# Altium PCB NEAR_DAUGHTER.PcbDoc
Units mm, origin at the board's own origin, x right, y up, seen from the top; angles counter-clockwise.
Board outline 16 x 30 mm, 4 copper layers (SIG TOP, GND, PWR, SIG BOT), stack 0.603 mm thick; 17 components, 22 nets, 141 pads, 49 vias.
Unrouted connection lines stored in the file: 23.
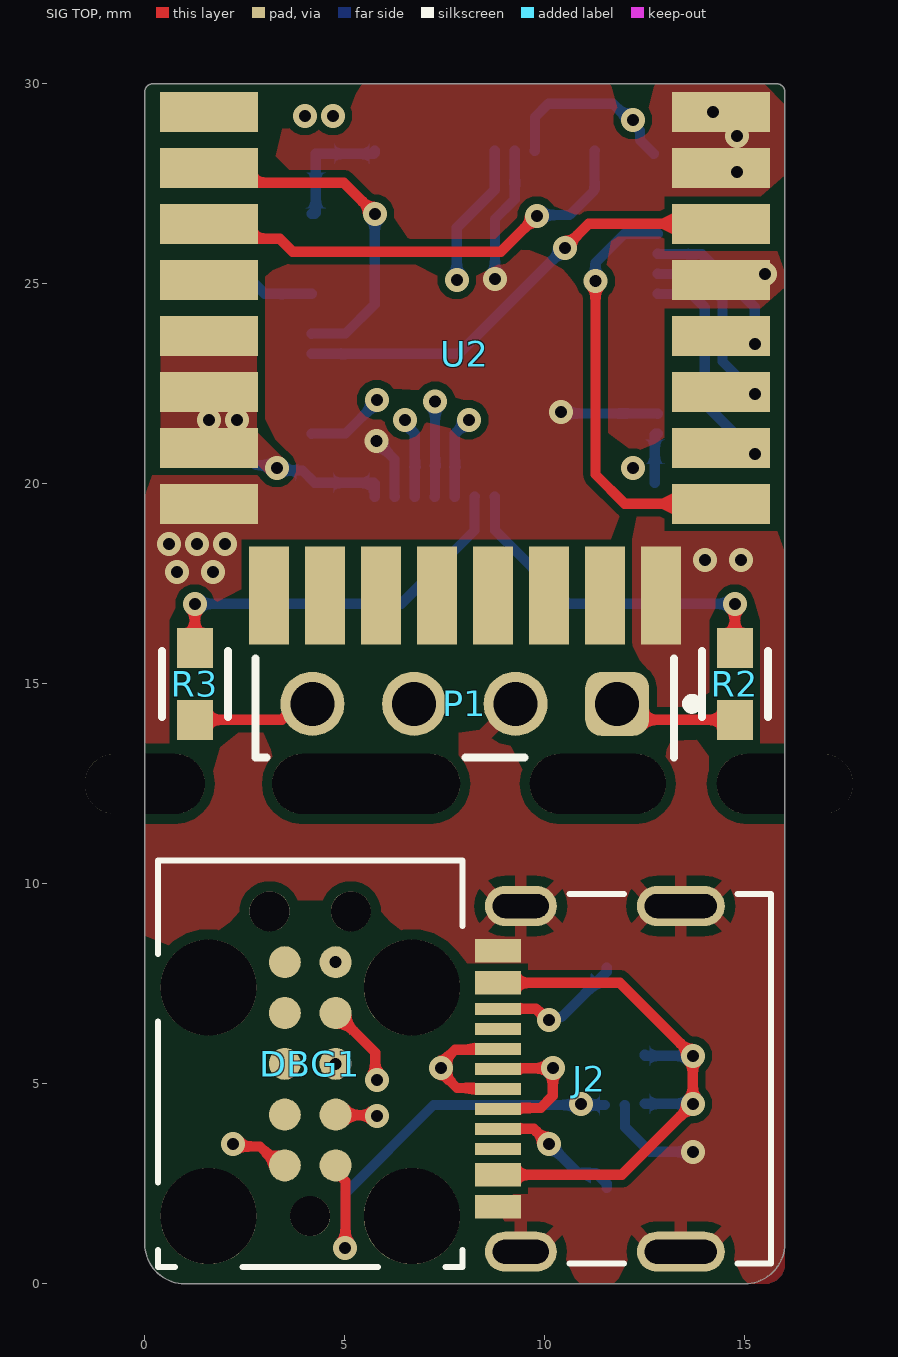
[diagram p0: SIG TOP view]
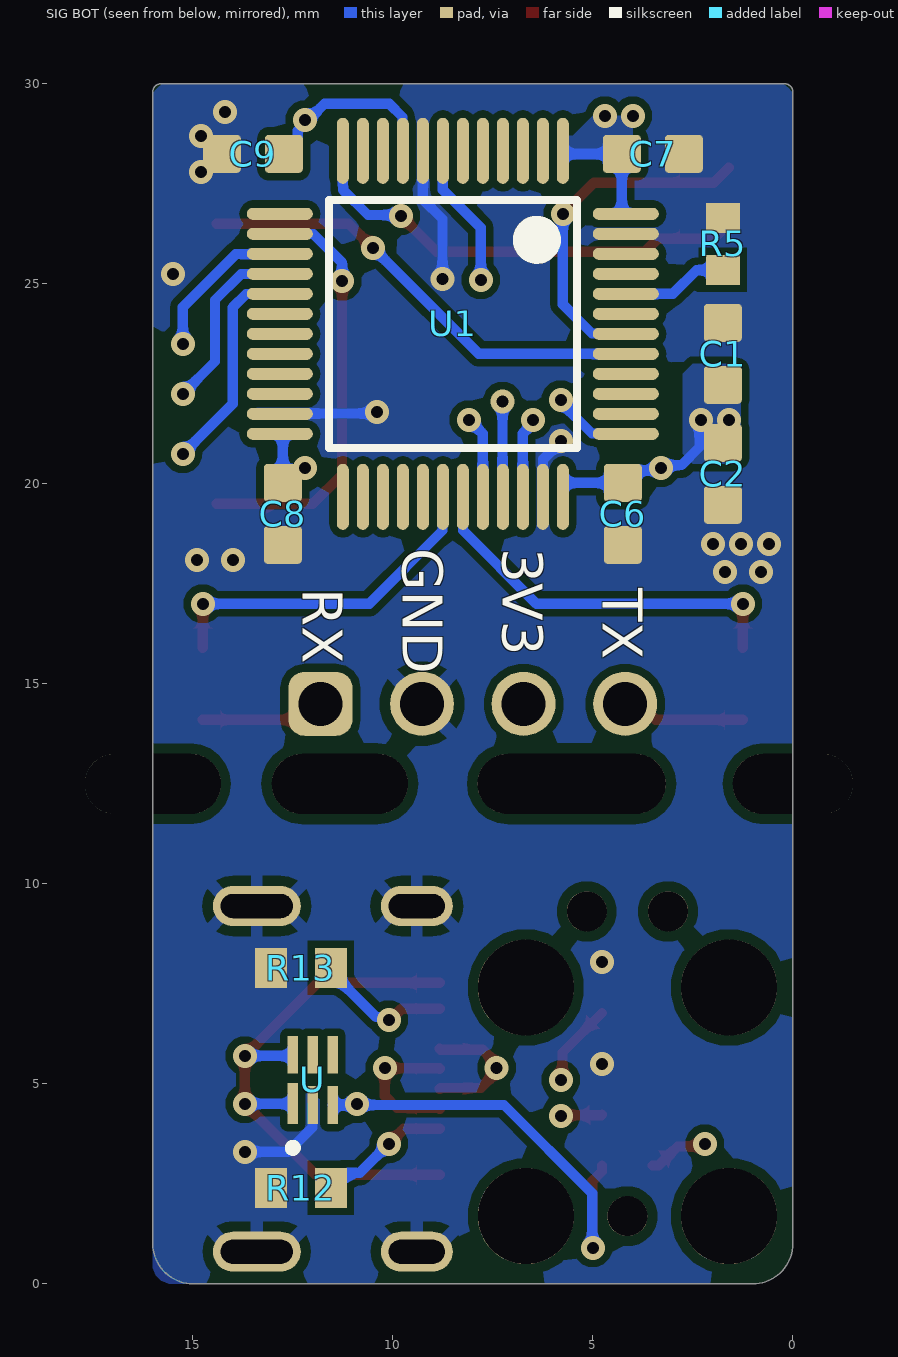
[diagram p1: SIG BOT view, seen from below]
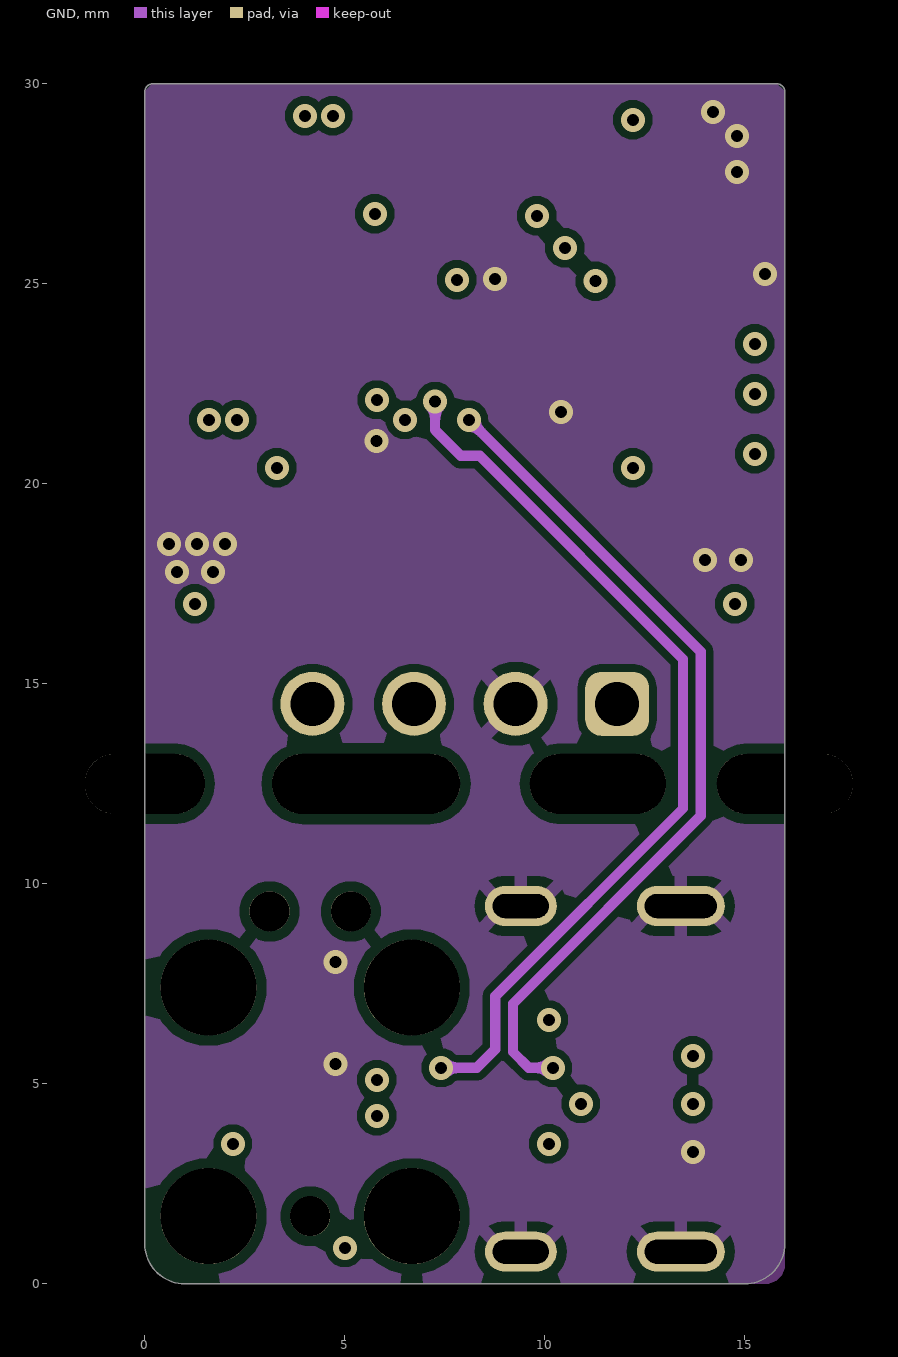
[diagram p2: GND]
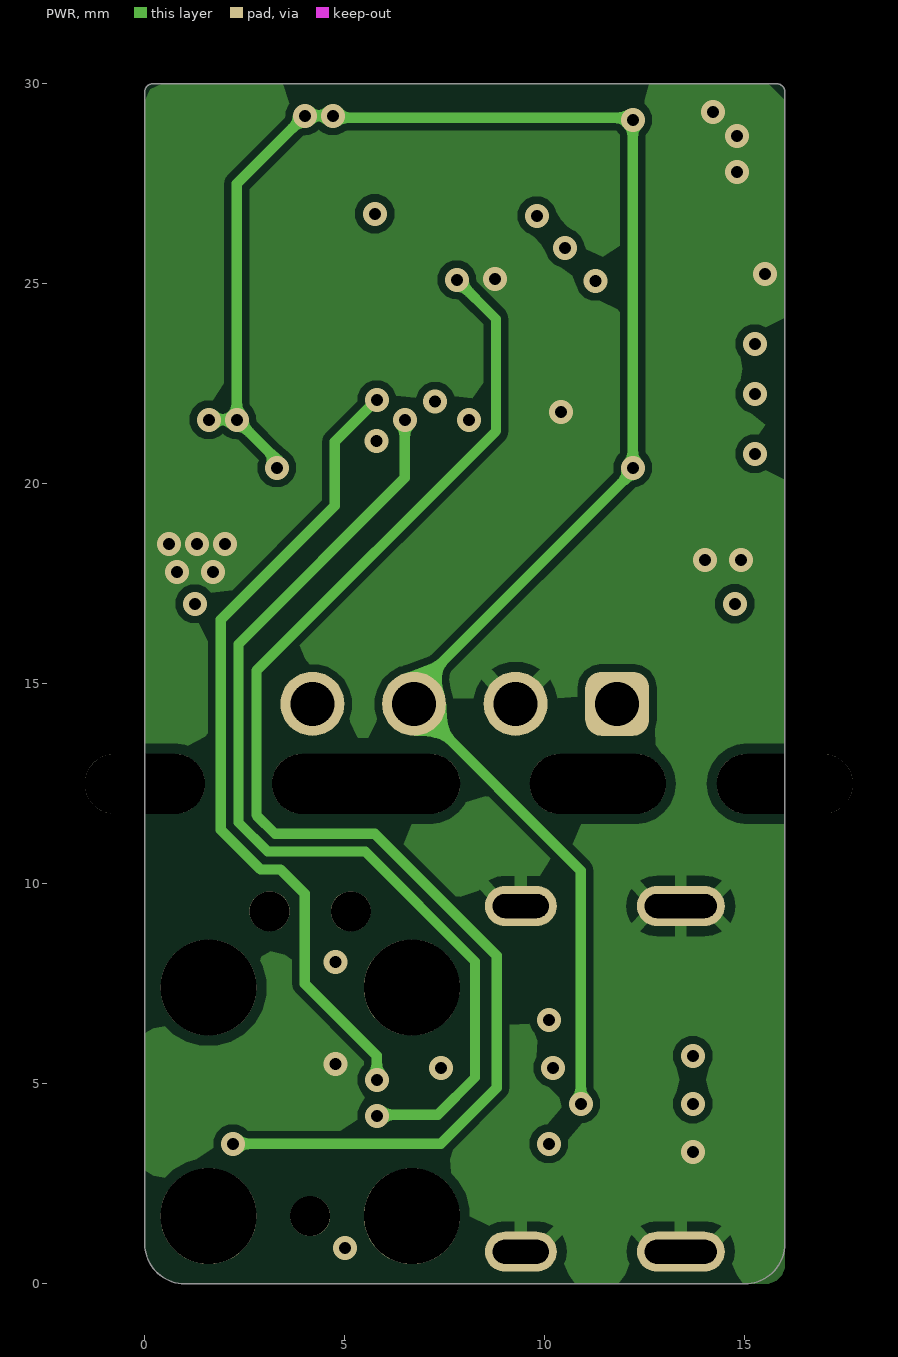
[diagram p3: PWR]
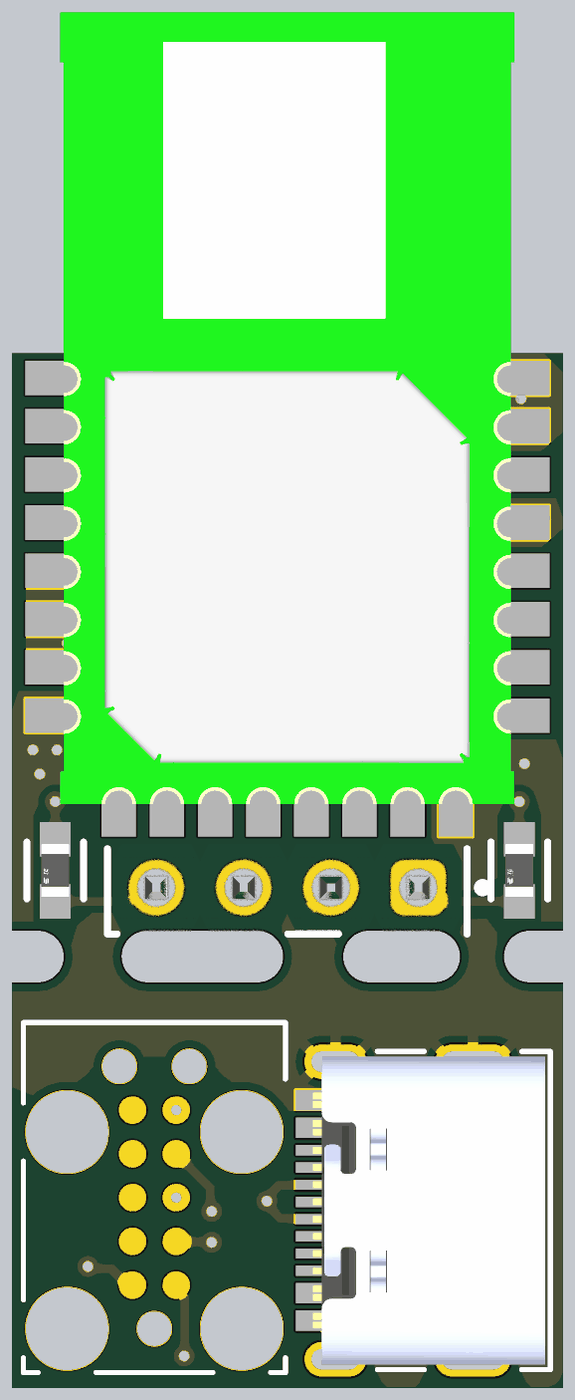
[diagram p4: 3D render of the assembled board from above, using the file's embedded part models]
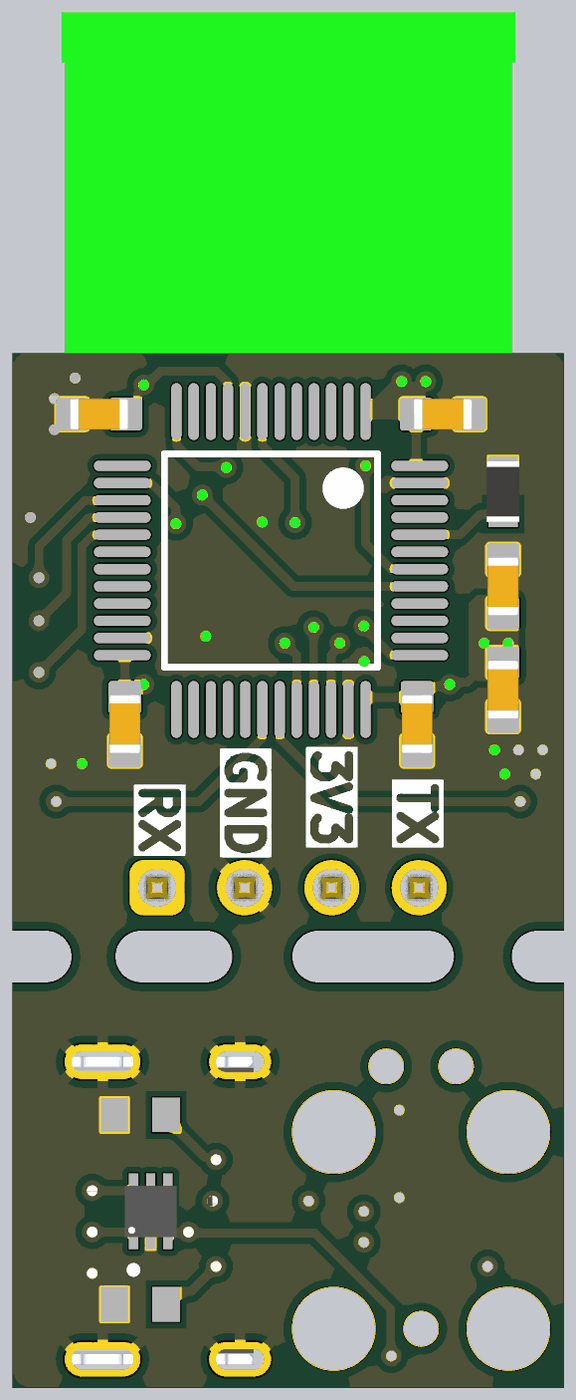
[diagram p5: 3D render of the assembled board from below, using the file's embedded part models]

## Layer stack, top to bottom
Top Solder: solder mask 0.0102, Solder Resist, Dk 3.5
SIG TOP: signal copper 0.0356
Dielectric 2: prepreg 0.0711, PP-006, Dk 4.1
GND: signal copper 0.035
Dielectric 1: dielectric 0.32, FR-4, Dk 4.8
PWR: signal copper 0.035
Dielectric 3: prepreg 0.0711, PP-006, Dk 4.1
SIG BOT: signal copper 0.0356
Bottom Solder: solder mask 0.0102, Solder Resist, Dk 3.5

## Board outline
1,0 15,0 ccw(c15,1) 16,1 16,29.8 ccw(c15.8,29.8) 15.8,30 0.2,30 ccw(c0.2,29.8) 0,29.8 0,1 ccw(c1,1)

## Design rules (kind name [scope] priority, off if disabled: settings)
Clearance "Stitching GND" [IsStitchingVia and InNet('GND') vs (IsVia and (Not IsStitchingVia)) Or IsPad] p1: gap=0.127 ignorepadtopadclearanceinfootprint=FALSE
Clearance [All] p2: gap=0.19 ignorepadtopadclearanceinfootprint=TRUE except(0: Arc-Text Track-Text SMDPad-Text THPad-Text Via-Text Fill-Text Poly-Text Region-Text Text-Text; 0.254: Arc-Via Arc-Hole Track-Via Track-Hole SMDPad-Via SMDPad-Hole THPad-Via THPad-Hole Via-Via Via-Hole Fill-Hole Poly-Hole Region-Hole Text-Hole)
DiffPairsRouting [All] p1: maxlimit=0.264 minlimit=0.264 mostfreqgap=0.264 toplayer_minwidth=0.19 toplayer_maxwidth=0.381 toplayer_prefwidth=0.381 midlayer1_minwidth=0.381 midlayer1_maxwidth=0.381 midlayer1_prefwidth=0.381 midlayer2_minwidth=0.254 midlayer2_maxwidth=0.381 midlayer2_prefwidth=0.381 bottomlayer_minwidth=0.254 bottomlayer_maxwidth=0.381 bottomlayer_prefwidth=0.381 maxuncoupledlength=16
Height [All] p1: minheight=0 maxheight=30 prefheight=12.7
HoleSize [All] p1: absolutevalues=TRUE maxlimit=6 minlimit=0.025 maxpercent=80.000 minpercent=20.000
MinimumSolderMaskSliver [All] p1: minsoldermaskwidth=0.075
PlaneClearance [All] p1: clearance=0.3
PlaneConnect PlaneConnect_1 [All] p1: planeconnectstyle=Relief reliefexpansion=0.508 reliefentries=4 reliefconductorwidth=0.254 reliefairgap=0.254
PolygonConnect [All] p1: connectstyle=Direct reliefconductorwidth=0.8 reliefentries=4 polygonreliefangle="90 Angle" airgapwidth=0.254
RoutingVias [All] p1: holewidth=0.3 width=0.6 viastyle="Through Hole" minholewidth=0.3 minwidth=0.6 maxholewidth=4 maxwidth=6
SilkToSolderMaskClearance [IsPad] p1: minsilkscreentomaskgap=0.25 clearancetoexposedcopper=TRUE
SolderMaskExpansion [All] p1: expansion=0.05 istentingtop=FALSE
SupplyNets "Schematic Supply Nets_9" [InNet('USB_P5V0')] p1: voltage=0.000
SupplyNets "Schematic Supply Nets_8" [InNet('GND')] p2: voltage=0.000
SupplyNets "Schematic Supply Nets_3" [InNet('P3V3')] p3: voltage=0.000
Width [All] p1: maxlimit=8 minlimit=0.19 preferedwidth=0.254 toplayer_maxwidth=1.27 midlayer2_maxwidth=1.27 bottomlayer_maxwidth=1.27 minimp=50.000000 maximp=50.000000 favimp=50.000000
23 further rules are at their usual default settings.

## Components (designator, comment, footprint, x,y, rotation, side; value= is the part's Value field where it differs from the comment)
C1 "1uF" CAP_0603 1.75,23.25 r90 bottom
C2 "1uF" CAP_0603 1.75,20.25 r270 bottom
C6 "1uF" CAP_0603 4.25,19.25 r90 bottom
C7 "1uF" CAP_0603 3.5,28.25 r0 bottom
C8 "1uF" CAP_0603 12.75,19.25 r90 bottom
C9 "1uF" CAP_0603 13.5,28.25 r180 bottom
DBG1 "TC2050-IDC" TC2050-IDC-Footprint-2 4.135,5.5 r90 top
J2 "2171790001" MOLEX_2171790001 12.25,5.125 r90 top
P1 "61300411121" 61300411121 8,14.5 r180 top
R2 "22R" FP-CPF0603-MFG 14.75,15 r90 top value=22Ω
R3 "22R" FP-CPF0603-MFG 1.25,15 r90 top value=22Ω
R5 "10k" RESC1609X55X30LL15T15 1.75,26 r270 bottom
R12 "5k1" RESC1608X55X25ML10T15 12.3,2.4 r0 bottom
R13 "5k1" RESC1608X55X25ML10T15 12.3,7.9 r180 bottom
U "TLV70033DSER" SON50P150X150X80-6N 12,5.1 r90 bottom
U1 "STM32F072CBT6TR" STM-LQFP48_M 8.5,24 r270 bottom
U2 "DWM1000" XCVR_DWM1000 8,27.5 r0 top

## Footprints (in the part's own frame and the unit in brackets; to place one, negate y for a bottom-side part, rotate by r counter-clockwise, add the part's x,y. Pads: shape width x height; smd on the part's side, far side on the other; paste and mask are expansions set on the pad)
61300411121 [mm] "Pin Header, pitch 2.54 mm, THT, Vertical, single row, 4p"
  rrect50% 1.6x1.6 hole 1.1: 1(-3.81,0)
  round 1.6 hole 1.1: 2(-1.27,0) 3(1.27,0) 4(3.81,0)
  silkscreen extent -5.81,-1.13 5.23,1.35, body extent -5.08,-1.27 5.08,1.27, height 8.57
CAP_0603 [mm] "Generic 0603 Ceramic Capacitor"
  rrect20% 0.95x0.95 smd: 1(-0.775,0) 2(0.775,0)
  body extent -0.85,-0.45 0.85,0.45, height 0.9
FP-CPF0603-MFG [mm]
  rect 1x0.9 smd paste+0 mask+0: 1(-0.9,0) 2(0.9,0)
  silkscreen extent -0.82,-0.82 0.82,0.82, body extent -1.5,-0.55 1.5,0.55, height 0.25
MOLEX_2171790001 [mm]
  rect 0.59x1.15 smd mask+0.064: A1B12(-3.2,3.425) A4B9(-2.4,3.425) B1A12(3.2,3.425) B4A9(2.4,3.425)
  rect 0.298x1.15 smd mask+0.064: A5(-1.25,3.425) A6(-0.25,3.425) A7(0.25,3.425) A8(1.25,3.425) B5(1.75,3.425) B6(0.75,3.425) B7(-0.75,3.425) B8(-1.75,3.425)
  oval 1x2.2 hole 0.6 slot 1.8 at 90 deg mask+0.064: SH1(-4.32,-1.15) SH2(4.32,-1.15)
  oval 1x1.8 hole 0.6 slot 1.4 at 90 deg mask+0.064: SH3(-4.32,2.85) SH4(4.32,2.85)
  silkscreen extent -4.62,-3.4 4.62,1.63, body extent -4.47,-3.25 4.47,3.5, height 3.25
RESC1608X55X25ML10T15 [mm] "Chip Resistor, 2-Leads, Body 1.60x0.80mm, IPC Low Density"
  rect 0.8x1 smd: 1(-0.75,0) 2(0.75,0)
  body extent -0.85,-0.45 0.85,0.45, height 0.55
RESC1609X55X30LL15T15 [mm] "Chip Resistor, 2-Leads, Body 1.75x0.95mm, IPC High Density"
  rect 0.75x0.85 smd: 1(-0.65,0) 2(0.65,0)
  body extent -0.87,-0.48 0.87,0.48, height 0.55
SON50P150X150X80-6N [mm]
  rrect7% 1.02x0.27 smd: 1(-0.59,0.5)
  rrect7% 0.94x0.27 smd: 2(-0.63,0) 3(-0.63,-0.5) 4(0.63,-0.5) 5(0.63,0) 6(0.63,0.5)
  silkscreen extent -1.8,0.4 -1.6,0.6, body extent -0.75,-0.75 0.75,0.75, height 0.81
STM-LQFP48_M [mm] "QFP, 48-Leads, Body 7x7mm, Pitch 0.5mm, IPC Low Density"
  oval 1.65x0.3 smd: 1(-4.325,2.75) 2(-4.325,2.25) 3(-4.325,1.75) 4(-4.325,1.25) 5(-4.325,0.75) 6(-4.325,0.25) 7(-4.325,-0.25) 8(-4.325,-0.75) 9(-4.325,-1.25) 10(-4.325,-1.75) 11(-4.325,-2.25) 12(-4.325,-2.75) 25(4.325,-2.75) 26(4.325,-2.25) 27(4.325,-1.75) 28(4.325,-1.25) 29(4.325,-0.75) 30(4.325,-0.25) 31(4.325,0.25) 32(4.325,0.75) 33(4.325,1.25) 34(4.325,1.75) 35(4.325,2.25) 36(4.325,2.75)
  oval 0.3x1.65 smd: 13(-2.75,-4.325) 14(-2.25,-4.325) 15(-1.75,-4.325) 16(-1.25,-4.325) 17(-0.75,-4.325) 18(-0.25,-4.325) 19(0.25,-4.325) 20(0.75,-4.325) 21(1.25,-4.325) 22(1.75,-4.325) 23(2.25,-4.325) 24(2.75,-4.325) 37(2.75,4.325) 38(2.25,4.325) 39(1.75,4.325) 40(1.25,4.325) 41(0.75,4.325) 42(0.25,4.325) 43(-0.25,4.325) 44(-0.75,4.325) 45(-1.25,4.325) 46(-1.75,4.325) 47(-2.25,4.325) 48(-2.75,4.325)
  silkscreen extent -3.1,-3.1 3.1,3.1, body extent -3.5,-3.5 3.5,3.5, height 1.6
TC2050-IDC-Footprint-2 [mm]
  round 0.8 smd paste-0.9: 1(-2.54,-0.635) 2(-1.27,-0.635) 3(0,-0.635) 4(1.27,-0.635) 5(2.54,-0.635) 6(2.54,0.635) 7(1.27,0.635) 8(0,0.635) 9(-1.27,0.635) 10(-2.54,0.635)
  round 1 hole 1 paste-2539.97: A(-3.81,0) B(3.81,-1.016) C(3.81,1.016)
  round 2.4 hole 2.4 paste-2539.97: D(-3.81,-2.54) E(1.905,-2.54) F(1.905,2.54) G(-3.81,2.54)
  silkscreen extent -5.08,-3.81 5.08,3.81
XCVR_DWM1000 [mm]
  rect 2.45x1 smd: 1(-6.4,1.8) 2(-6.4,0.4) 3(-6.4,-1) 4(-6.4,-2.4) 5(-6.4,-3.8) 6(-6.4,-5.2) 7(-6.4,-6.6) 8(-6.4,-8) 17(6.4,-8) 18(6.4,-6.6) 19(6.4,-5.2) 20(6.4,-3.8) 21(6.4,-2.4) 22(6.4,-1) 23(6.4,0.4) 24(6.4,1.8)
  rect 1x2.45 smd: 9(-4.9,-10.295) 10(-3.5,-10.295) 11(-2.1,-10.295) 12(-0.7,-10.295) 13(0.7,-10.295) 14(2.1,-10.295) 15(3.5,-10.295) 16(4.9,-10.295)
  body extent -6.6,-10.58 6.6,12.42, height 3.16

## Part data
C1 C2 C6 C7 C8 C9: library part CMP-001-00097-1, "Cap Ceramic 1uF 25V X7R 10% Pad SMD 0603 125C Automotive T/R", Case/Package=0603, Dielectric=X7R, Tolerance=10%, Voltage Rating=25V, Capacitance=1uF
DBG1: library part CMP-002-00071-4, "CBL PLUG-OF-NAILS 10-PIN W/LEGS"
J2: library part CMP-002-00656-1, "USB Type C - Connector, Top-mount SMT, 16pos", Case/Package=None, Check_prices=https://www.snapeda.com/parts/217179-0001/Molex/view-part/?ref=eda, Design Item ID=2171790001, MF=Molex, MP=217179-0001, SnapEDA_Link=https://www.snapeda.com/parts/217179-0001/Molex/view-part/?ref=snap, Source=2171790001.SchLib
P1: library part CMP-002-00283-1, "WR-PHD Pin Header, THT, Vertical, pitch 2.54mm, 1 Row, 4P", Contact Resistance=20mOhm, Manufacturer="Wurth Elektronik", Operating Temperature Max=105°C, Operating Temperature Min=-40°C, Rated Current=3A, Withstanding Voltage=500V, Working Voltage=250V, Category="Board-to-Board Connectors", Component Type=Standard, ComponentLink1Description="Website Link", ComponentLink1URL=https://www.we-online.com/redexpert/article/61300411121?ad, ComponentLink2Description="Datasheet Link", ComponentLink2URL=https://www.we-online.com/redexpert/spec/61300411121?ad, Design Item ID=61300411121, Gender="Pin Header", Manufacturer Part Number=61300411121, Match Code=WR-PHD, Mount="Through Hole", Number of Rows=1, Orientation=Vertical, packaging=Bag, Pin Count=4, Pins=4, Pitch=2.54mm, Source=WR-PHD.SchLib
R2 R3: library part CMP-03211-007811-1, "RES SMD 22Ω 0.1% 1/16W 0603", Manufacturer="TE Connectivity", Manufacturer Part Number=CPF0603B22RE1, Package=CPF0603, Power Rating=0.063W, Resistance=22Ω, Temperature="-55°C to +155°C", Temperature Coefficient=25ppm/°C, Temperature Range High=+155°C, Temperature Range Low=-55°C, Tolerance=0.1%, Voltage Rating=50V, Automotive=No, Category=Res, ComponentLink2Description=Datasheet, ComponentLink2URL=https://www.te.com/commerce/DocumentDelivery/DDEController?Action=showdoc&DocId=Data+Sheet%7F1773200%7FM%7Fpdf%7FEnglish%7FENG_DS_1773200_M.pdf%7F3-1676481-2, Composition="Thin Film", Device Class L1="Passive Components", Device Class L2=Resistors, Device Class L3="Chip SMD Resistors", Height=0.55mm, Ipc Land Pattern Name=RESC15580X45, Lead Free=Yes, Octopart=https://octopart.com/cpf0603b22re1-te+connectivity-9539398, octopart_url=https://octopart.com/cpf0603b22re1-te+connectivity-9539398, packaging="1k Reel", RoHS=TRUE, Series=CPF
R5: library part CMP-1012-00623-3, "Chip Resistor, 10 KOhm, +/- 1%, 0.1 W, -55 to 155 degC, 0603 (1608 Metric), RoHS, Tape and Reel", Case Code (Imperial)=0603, Case Code (Metric)=1608, Manufacturer=Panasonic, Max Operating Temperature=155degC, Max Power Dissipation=100mW, Min Operating Temperature=-55degC, Package Description="2-Pin Surface Mount Device, Body 1.6 x 0.85 mm", Package Quantity=1, Package Reference=603, Resistance=10KOhm, Temperature Coefficient=100ppm\/degreesC, Tolerance=1%, Voltage Rating=75V, Case\/Package=0603, Composition=ThickFilm, Contact Plating=Tin, Datasheet URL=https://industrial.panasonic.com/cdbs/www-data/pdf/RDA0000/AOA0000C304.pdf, Datasheet Version=02/2017, Depth=0.8mm, Height=0.45mm, Lead Free=LeadFree, Length=1.6mm, Manufacturer URL=http://www.panasonic.com/, Military Standard=Not, Mount=SurfaceMount, Mounting Technology=SurfaceMount, Number of Pins=2, Number of Terminations=2, packaging=TapeandReel, Power Rating=100mW, Radiation Hardening=No, REACH SVHC=NoSVHC, RoHSCompliant=true, Termination=SMD/SMT, Voltage Rating (DC)=75V, Width=0.031inch
R12 R13: library part CMP-2000-04091-1, Manufacturer=Yageo, Part Number=RC0603FR-075K1L
U: library part CMP-019-00083-5, "Linear Voltage Regulator IC 1 Output 200mA 6-WSON _1.5x1.5_", Case/Package="WFDFN-6 Texas Instruments", Availability=Unavailable, Component Type=Standard, Design Item ID=TLV70033DSER, MF="Texas Instruments", MP=TLV70033DSER, Pins=4, Price=None, SnapEDA_Link=https://www.snapeda.com/parts/TLV70033DSER/Texas%20Instruments/view-part/562119/?ref=snap, Source=SnapEDAsch.SchLib
U1: library part CMP-0304-00171-1, "ARM Cortex-M0 32-bit MCU, 128 KB Flash, 16 KB Internal RAM, 37 I/Os, 48-Pin LQFP, -40 to 85 degC, Tape and Reel", I/Os (High Current)=37, Operating Frequency(F) (Processor speed) (MHz)=48, Package Description="48-Pin Low Profile Quad Flat Package, Body 7 x 7 mm, Pitch 0.5 mm", Package Reference=LQFP48, Supply Voltage(Vcc) min (V)=2, ComponentLink1Description="Manufacturer URL", ComponentLink1URL=http://www.st.com/, ComponentLink2Description=Datasheet, ComponentLink2URL=http://www.st.com/st-web-ui/static/active/en/resource/technical/document/datasheet/DM00090510.pdf, Core="ARM Cortex-M0", D/A Converter=1, DatasheetVersion="Rev. 5", FLASH Size (Prog) (kB)=128, Internal RAM Size (kB)=16, Mounting Technology="Surface Mount", Packing="Tape and Reel"
U2: library part CMP-236-000000-2, "802.15.4 IR-UWB Transceiver Module 3.5GHz ~ 6.5GHz Integrated, Chip Surface Mount", Package="Module Decawave", Availability=Unavailable, Component Type=Standard, Design Item ID=DWM1000, MF="Decawave Limited", MP=DWM1000, Pin Count=24, Price=None, SnapEDA_Link=https://www.snapeda.com/parts/DWM1000/Decawave%20Limited/view-part/327593/?ref=snap, Source=SnapEDAsch.SchLib

## Free pads (board coordinates)
  oval 3x1.5 hole 1.5 slot 3 at 0 deg unplated: 2(0,12.5)
  oval 4.7x1.5 hole 1.5 slot 4.7 at 0 deg unplated: 2(5.53,12.5)
  oval 3.4x1.5 hole 1.5 slot 3.4 at 0 deg unplated: 2(11.325,12.5) 2(16,12.5)

## Via types
v1: diameter 0.6, hole 0.3, SIG TOP to SIG BOT, tented both sides, 47 vias
v2: diameter 0.6, hole 0.3, SIG TOP to SIG BOT, 2 vias

## Nets (pads, with @x,y where several pads share a name; then routed paths per layer and width w, separated by ;. In a path a pad name is that pad's centre, name@x,y a point inside that pad or via, vN(x,y) a via of type N, cw(c..) or ccw(c..) an arc to the next point about the centre after c; other vN are vias at no path point)
BOOT0: R5.2 U1.44 | length 2.7
  SIG BOT w0.254: R5.2 1.757,25.343 2.407,25.343 3,24.75 U1.44
DW_RST: U1.12 U2.3 | length 11.6
  SIG TOP w0.254: U2.3 1.973,26.127 3.373,26.127 3.7,25.8 8.9,25.8 v1(9.8,26.7)
  SIG BOT w0.254: v1(9.8,26.7) 9.821,26.721 10.621,26.721 11.241,27.341 11.241,28.316 U1.12
GND: C1.2 C2.2 C6.1 C7.1 C8.1 C9.1 DBG1.3 DBG1.5 J2.A1B12 J2.B1A12 J2.SH1 J2.SH2 J2.SH3 J2.SH4 P1.2 R5.1 R12.2 R13.1 U1.8 U1.23 U1.35 U1.47 U2.8 U2.16 U2.21 U2.23 U2.24 U.2 | length 9.9
  SIG BOT w0.254: v1(5.791,21.067) 6.241,20.617 6.241,19.684 U1.35 ; v1(8.756,25.119) 8.756,26.619 9.25,27.113 U1.8 ; v1(10.4,21.8) 10.441,21.759 12.816,21.759 U1.23 ; U.2 12.008,4.462 12.008,3.914 12.622,3.3 v1(13.7,3.3)
  other v1: 0.8,17.8 1.7,17.8 14,18.1 14.9,18.1 0.6,18.5 1.3,18.5 2,18.5 15.5,25.25 14.8,27.8 14.8,28.7 14.2,29.3
  other v2: 4.77,5.5 4.77,8.04
IRQ: U1.41 U2.22 | length 11.6
  SIG TOP w0.254: v1(10.5,25.9) 11.1,26.5 U2.22
  SIG BOT w0.254: U1.41 7.85,23.25 v1(10.5,25.9)
NetJ2_A5: J2.A5 R12.1 | length 3.4
  SIG TOP w0.254: J2.A5 9.725,3.875 v1(10.1,3.5)
  SIG BOT w0.254: v1(10.1,3.5) 10.827,2.773 11.277,2.773 11.55,2.5 R12.1
NetJ2_B5: J2.B5 R13.2 | length 3.4
  SIG TOP w0.254: J2.B5 9.781,6.875 10.056,6.6 v1(10.1,6.6)
  SIG BOT w0.254: v1(10.1,6.6) 10.166,6.666 10.416,6.666 11.55,7.8 R13.2
NRST: DBG1.10 U1.7 | length 39.4
  SIG TOP w0.254: v1(2.2,3.5) 2.266,3.434 2.878,3.434 3.352,2.96 DBG1.10
  PWR w0.254: v1(2.2,3.5) 7.4,3.5 8.8,4.9 8.8,8.2 5.75,11.25 3.256,11.25 2.788,11.718 2.788,15.325 8.781,21.318 8.781,24.119 v1(7.8,25.1)
  SIG BOT w0.254: v1(7.8,25.1) 7.8,26.4 8.75,27.35 U1.7
P3V3: C1.1 C2.1 C6.2 C7.2 C8.2 C9.2 DBG1.1 P1.3 U1.1 U1.9 U1.24 U1.36 U1.48 U2.5 U2.6 U2.7 U.3 | length 72.3
  SIG TOP w0.254: DBG1.1 4.77,2.812 5.016,2.566 5.016,0.916 v1(5,0.9)
  PWR w0.254: v1(1.6,21.6) v1(2.3,21.6) ; v1(3.3,20.4) 3.234,20.466 3.234,20.666 v1(2.3,21.6) ; v1(10.9,4.5) 10.9,10.33 P1.3 6.73,14.836 12.2,20.306 v1(12.2,20.4) v1(12.2,29.1) 12.15,29.15 4.75,29.15 v1(4.7,29.2) v1(4,29.2) 2.3,27.5 v1(2.3,21.6)
  SIG BOT w0.254: v1(2.3,21.6) 2.331,21.569 2.331,20.919 2.784,20.466 3.234,20.466 v1(3.3,20.4) 3.366,20.334 3.941,20.334 C6.2 5.729,20.025 5.75,20.004 U1.36 ; U1.48 4.254,26.75 4.275,26.771 C7.2 5.729,28.25 5.75,28.271 U1.1 ; v1(5,0.9) 5.016,0.916 5.016,2.267 7.219,4.47 U.3 ; U1.9 9.759,28.334 9.759,29.169 10.09,29.5 11.706,29.5 12.106,29.1 v1(12.2,29.1) 12.2,29.006 12.377,28.829 12.377,28.598 C9.2 ; C8.2 12.75,21.229 12.771,21.25 U1.24
RX: P1.1 R2.1 | length 3.1
  SIG TOP w0.254: P1.1 12.21,14.1 R2.1
SPI1_CLK: U1.15 U2.20 | length 3.9
  SIG BOT w0.254: U1.15 12.834,25.741 13.925,25.741 15.25,24.416 v1(15.25,23.5)
SPI1_CS: U1.14 U2.17 | length 10.6
  SIG TOP w0.254: v1(11.266,25.066) 11.266,20.234 12,19.5 U2.17
  SIG BOT w0.254: v1(11.266,25.066) 11.266,25.527 11.981,26.241 12.816,26.241 U1.14
SPI1_MISO: U1.16 U2.19 | length 4.6
  SIG BOT w0.254: U1.16 12.834,25.241 13.797,25.241 14.444,24.594 14.444,23.056 v1(15.25,22.25)
SPI1_MOSI: U1.17 U2.18 | length 5.5
  SIG BOT w0.254: U1.17 12.834,24.741 13.669,24.741 14,24.41 14,22 v1(15.25,20.75)
SWCLK: DBG1.4 U1.37 | length 24.6
  SIG TOP w0.254: DBG1.4 5.759,5.781 5.759,5.141 v1(5.8,5.1)
  PWR w0.254: v1(5.8,5.1) 5.8,5.7 4,7.5 4,9.75 3.388,10.362 2.888,10.362 1.9,11.35 1.9,16.6 4.75,19.45 4.75,21.05 v1(5.8,22.1)
  SIG BOT w0.254: U1.37 4.184,21.259 5.019,21.259 5.8,22.04 v1(5.8,22.1)
SWDIO: DBG1.2 U1.34 | length 28
  SIG TOP w0.254: DBG1.2 4.785,4.215 5.785,4.215 v1(5.8,4.2)
  PWR w0.254: v1(5.8,4.2) 5.828,4.228 7.328,4.228 8.256,5.156 8.256,8.06 5.51,10.806 3.072,10.806 2.344,11.534 2.344,15.993 6.5,20.149 v1(6.5,21.6)
  SIG BOT w0.254: v1(6.5,21.6) 6.5,21.506 6.75,21.256 U1.34
TX: P1.4 R3.1 | length 3.1
  SIG TOP w0.254: R3.1 3.426,14.1 3.826,14.5 P1.4
USART1_RX: R3.2 U1.31 | length 9.7
  SIG TOP w0.254: R3.2 v1(1.25,17)
  SIG BOT w0.254: v1(1.25,17) 6.41,17 8.241,18.831 8.241,19.666 U1.31
USART1_TX: R2.2 U1.30 | length 8.7
  SIG TOP w0.254: R2.2 v1(14.75,17)
  SIG BOT w0.254: U1.30 8.759,19.666 8.759,18.831 10.59,17 v1(14.75,17)
USB_DM: J2.A7 J2.B7 U1.32 | length 27
  SIG TOP w0.254: J2.B7 8.847,4.397 9.897,4.397 10.2,4.7 v1(10.2,5.4) 10.188,5.388 8.838,5.388 J2.A7
  GND w0.254: v1(8.1,21.6) 13.9,15.8 13.9,11.7 9.205,7.006 9.205,5.795 9.6,5.4 v1(10.2,5.4)
  SIG BOT w0.254: U1.32 7.75,21.25 v1(8.1,21.6)
USB_DP: J2.A6 J2.B6 U1.33 | length 28.3
  SIG TOP w0.254: J2.A6 8.803,4.897 7.803,4.897 7.405,5.295 7.405,5.505 7.753,5.853 8.803,5.853 J2.B6
  GND w0.254: v1(7.259,22.059) 7.259,21.341 7.9,20.7 8.372,20.7 13.456,15.616 13.456,11.884 8.761,7.19 8.761,5.861 8.3,5.4 v1(7.405,5.4)
  SIG BOT w0.254: U1.33 7.259,19.684 v1(7.259,22.059)
USB_P5V0: J2.A4B9 J2.B4A9 U.1 U.6 | length 14.9
  SIG TOP w0.254: J2.A4B9 11.925,2.725 v1(13.7,4.5) v1(13.7,5.7) 11.875,7.525 J2.B4A9
  SIG BOT w0.254: U.1 12.5,4.508 12.508,4.5 v1(13.7,4.5) ; U.6 12.5,5.708 12.508,5.7 v1(13.7,5.7)
WAKE: U1.42 U2.2 | length 8.8
  SIG TOP w0.254: U2.2 1.973,27.527 4.973,27.527 v1(5.75,26.75)
  SIG BOT w0.254: U1.42 4.184,23.759 5.019,23.759 5.75,24.49 v1(5.75,26.75)
pads on no net: DBG1.6 DBG1.7 DBG1.8 DBG1.9 DBG1.A DBG1.B DBG1.C DBG1.D DBG1.E DBG1.F DBG1.G J2.A8 J2.B8 U1.2 U1.3 U1.4 U1.5 U1.6 U1.10 U1.11 U1.13 U1.18 U1.19 U1.20 U1.21 U1.22 U1.25 U1.26 U1.27 U1.28 U1.29 U1.38 U1.39 U1.40 U1.43 U1.45 U1.46 U2.1 U2.4 U2.9 U2.10 U2.11 U2.12 U2.13 U2.14 U2.15 U.4 U.5

## Polygon pours and split planes (outlines as drawn)
GND on SIG BOT "GND_L04_P004" (solid, remove dead copper, pour order 4): 0,29.8 0,1 ccw(c1,1) 1,0 15.5,0 ccw(c15.5,0.5) 16,0.5 16,29.8 ccw(c15.8,29.8) 15.8,30 0.2,30 ccw(c0.2,29.8)
P3V3 on SIG BOT "P3V3_L04_P000" (solid, remove dead copper, pour order 0): 1.3,22.8 1.3,20.7 1.5,20.5 2.5,20.5 2.75,20.75 2.75,22.75 2.5,23 1.5,23
P3V3 on SIG BOT "P3V3_L04_P002" (solid, pour order 2): 4,29.2 4,28.1 5.579,28.1 5.729,28.25 5.7,28.279 5.7,28.7 5.5,28.7 5,29.2
P3V3 on SIG TOP "P3V3_L01_P001" (solid, pour order 1): 0.4,24.1 0.4,20.5 2.8,20.5 3.1,20.2 3.3,20.2 3.5,20.4 3.5,20.6 2.8,21.3 2.8,24.1
GND on SIG TOP "GND_L01_P005" (solid, remove dead copper, pour order 5): 0,29.8 0,1 ccw(c1,1) 1,0 15.5,0 ccw(c15.5,0.5) 16,0.5 16,29.8 ccw(c15.8,29.8) 15.8,30 0.2,30 ccw(c0.2,29.8)
GND on GND "GND_L02_P007" (solid, remove dead copper, pour order 7): 0,29.8 0,1 ccw(c1,1) 1,0 15.5,0 ccw(c15.5,0.5) 16,0.5 16,29.8 ccw(c15.8,29.8) 15.8,30 0.2,30 ccw(c0.2,29.8)
GND on PWR "GND_L03_P006" (solid, remove dead copper, pour order 6): 0,29.8 0,1 ccw(c1,1) 1,0 15.5,0 ccw(c15.5,0.5) 16,0.5 16,29.8 ccw(c15.8,29.8) 15.8,30 0.2,30 ccw(c0.2,29.8)

## Silkscreen, mask and mechanical layers (free items; w line width, h text height)
Bottom Overlay:
  text "3V3" at 7.25,18.383 h1 r90
  text "GND" at 9.75,18.383 h1 r90
  text "TX" at 4.75,17.383 h1 r90
  text "RX" at 12.25,17.383 h1 r90